# Altium PCB SerialIO.PCBDOC
Units mil, origin at the board's own origin, x right, y up, seen from the top; angles counter-clockwise.
Board outline 6250 x 3000 mil, 4 copper layers (Top Layer, Internal Plane 1, Internal Plane 2, Bottom Layer); 89 components, 92 nets, 484 pads, 631 vias.
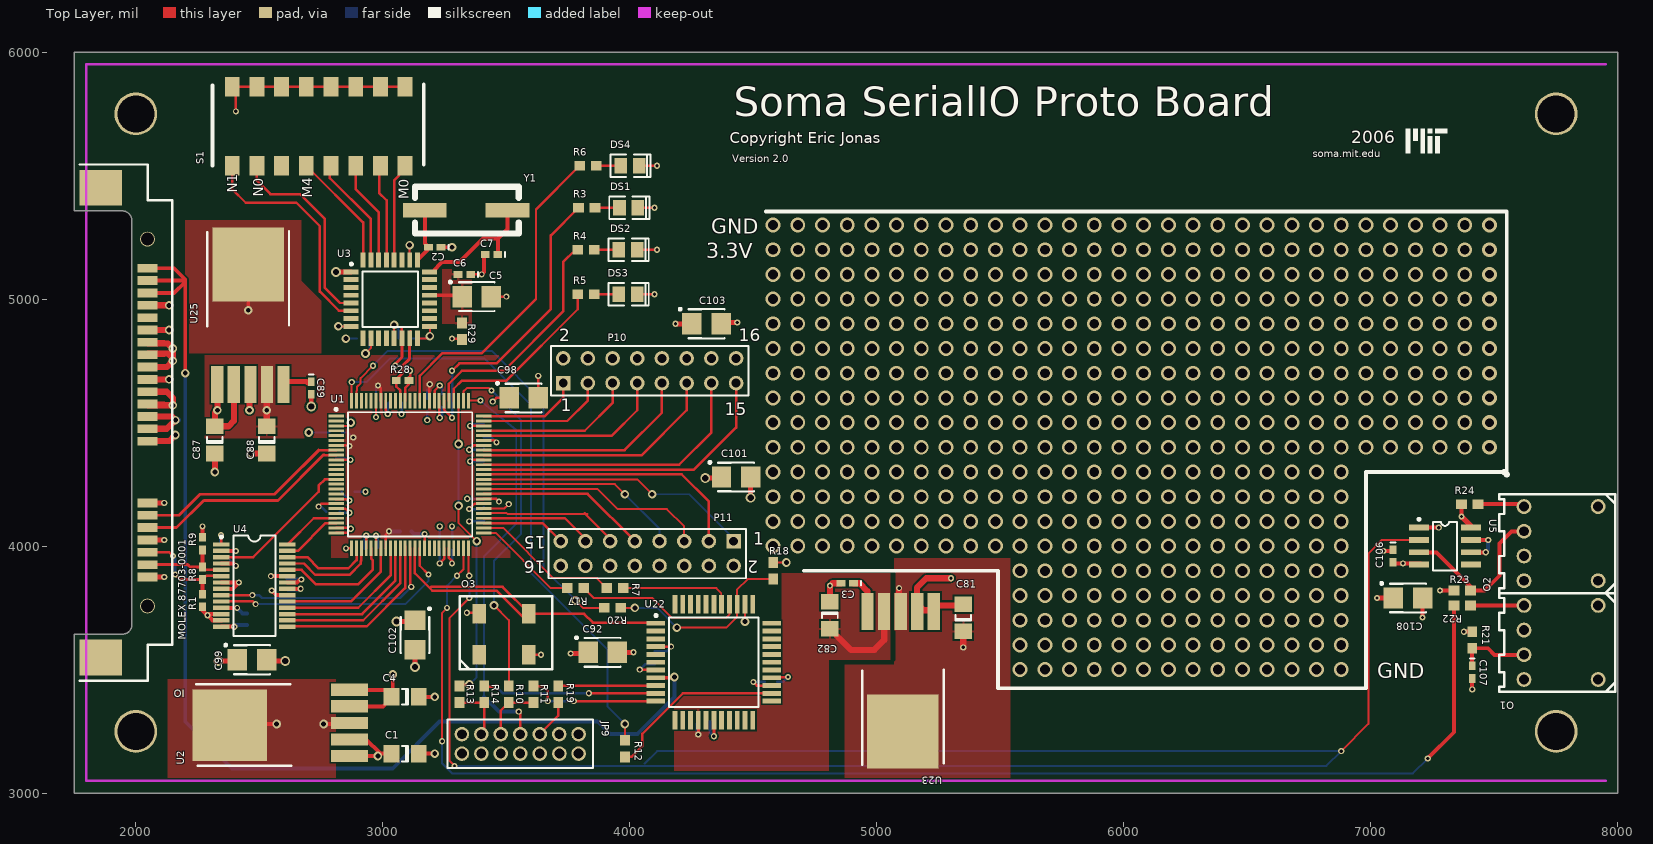
[diagram p0: Top Layer view]
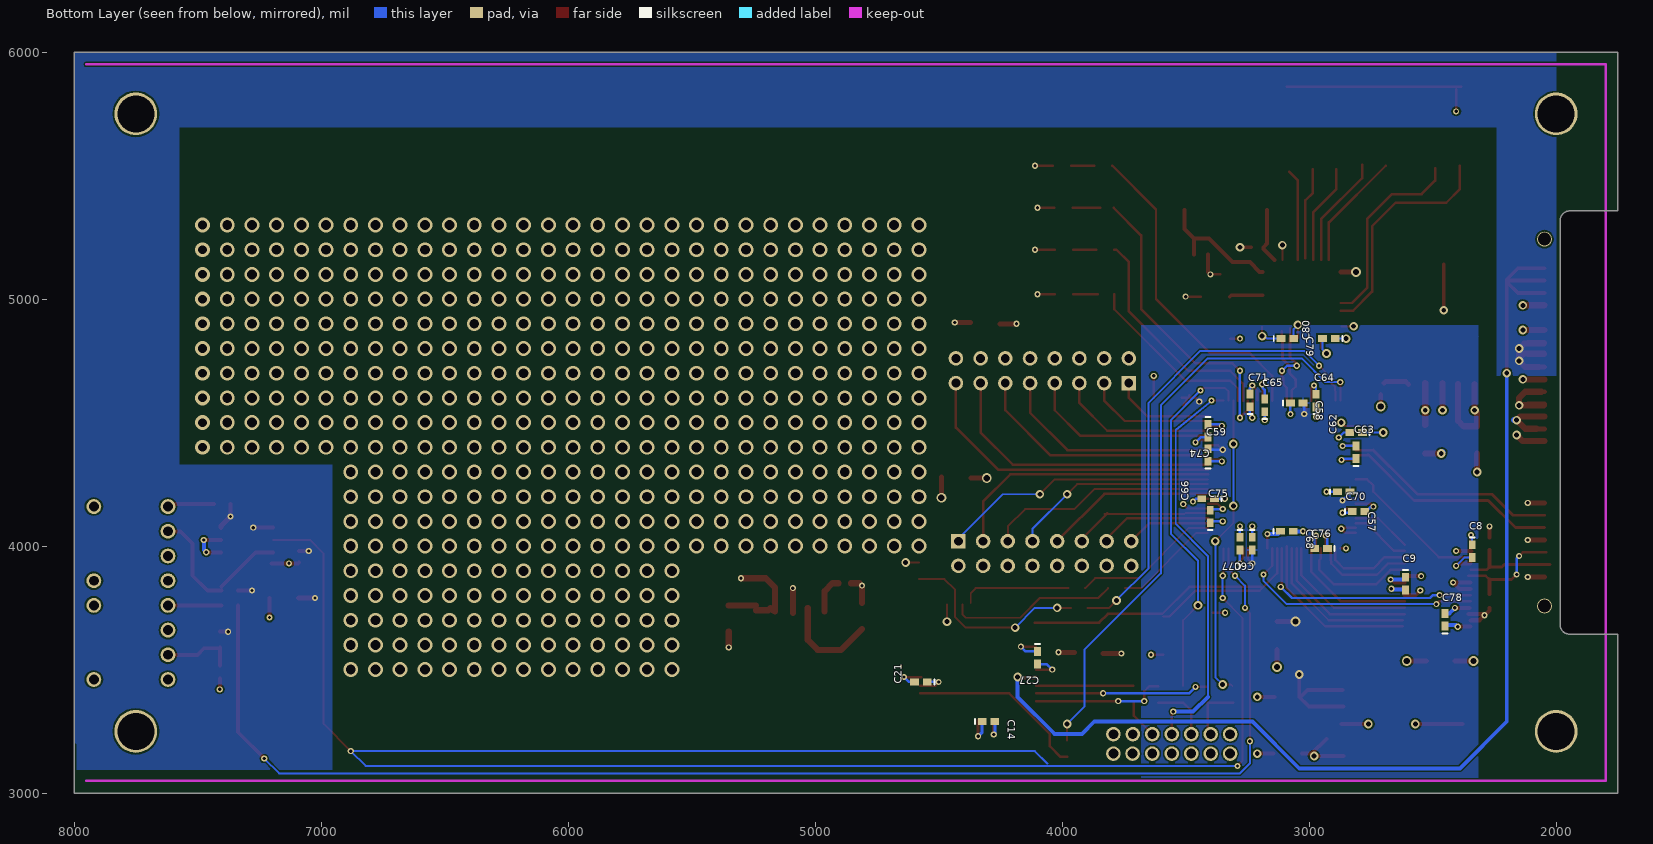
[diagram p1: Bottom Layer view, seen from below]
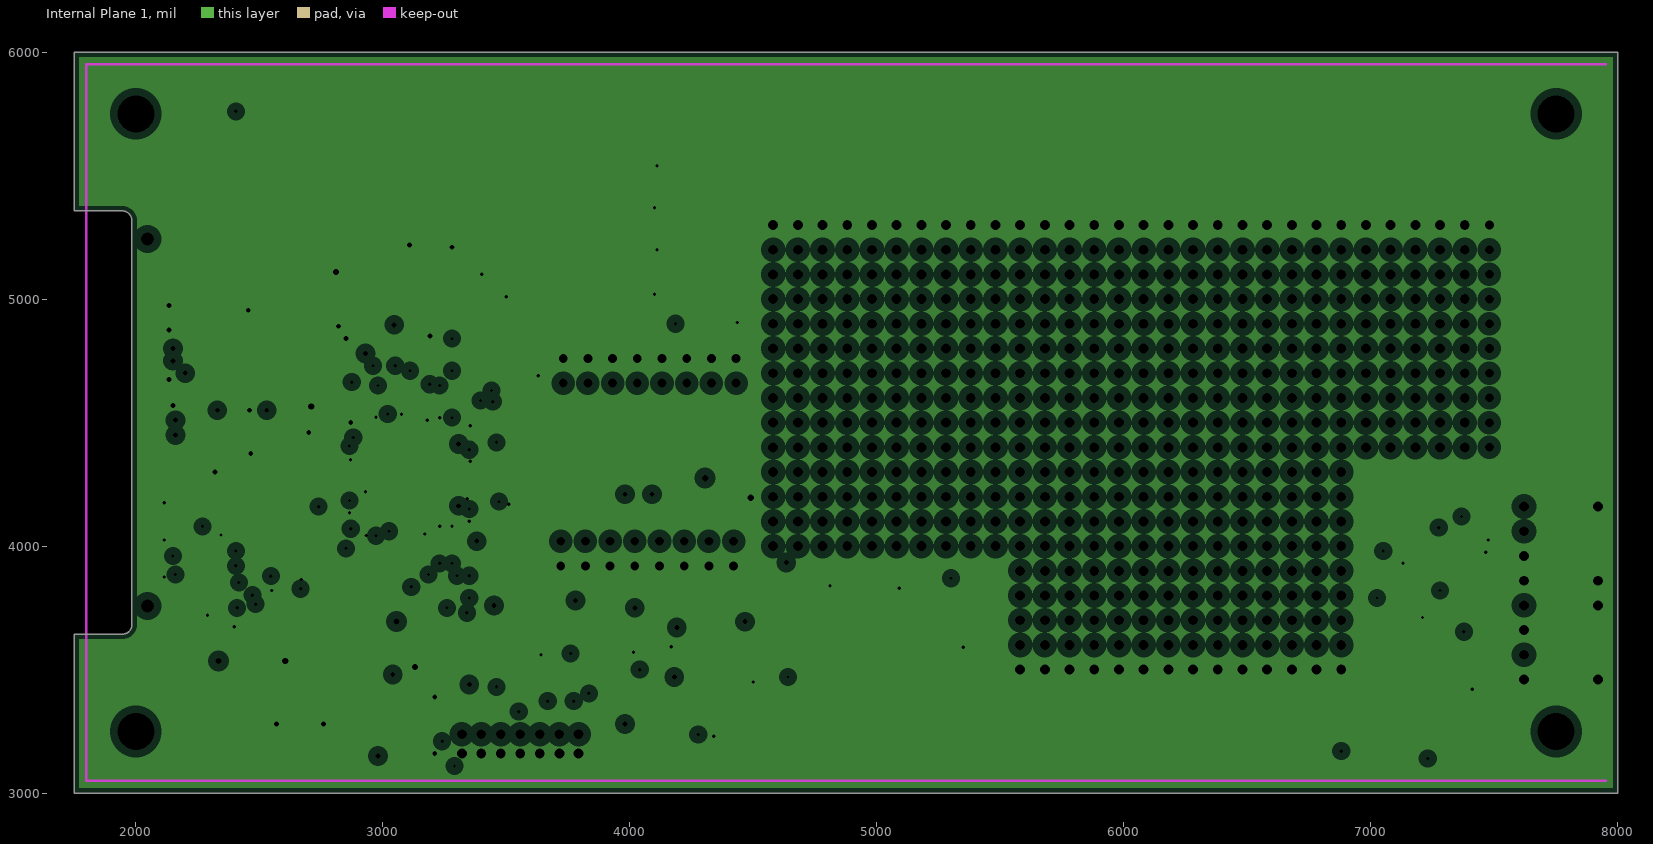
[diagram p2: Internal Plane 1, clearances drawn from the general rule]
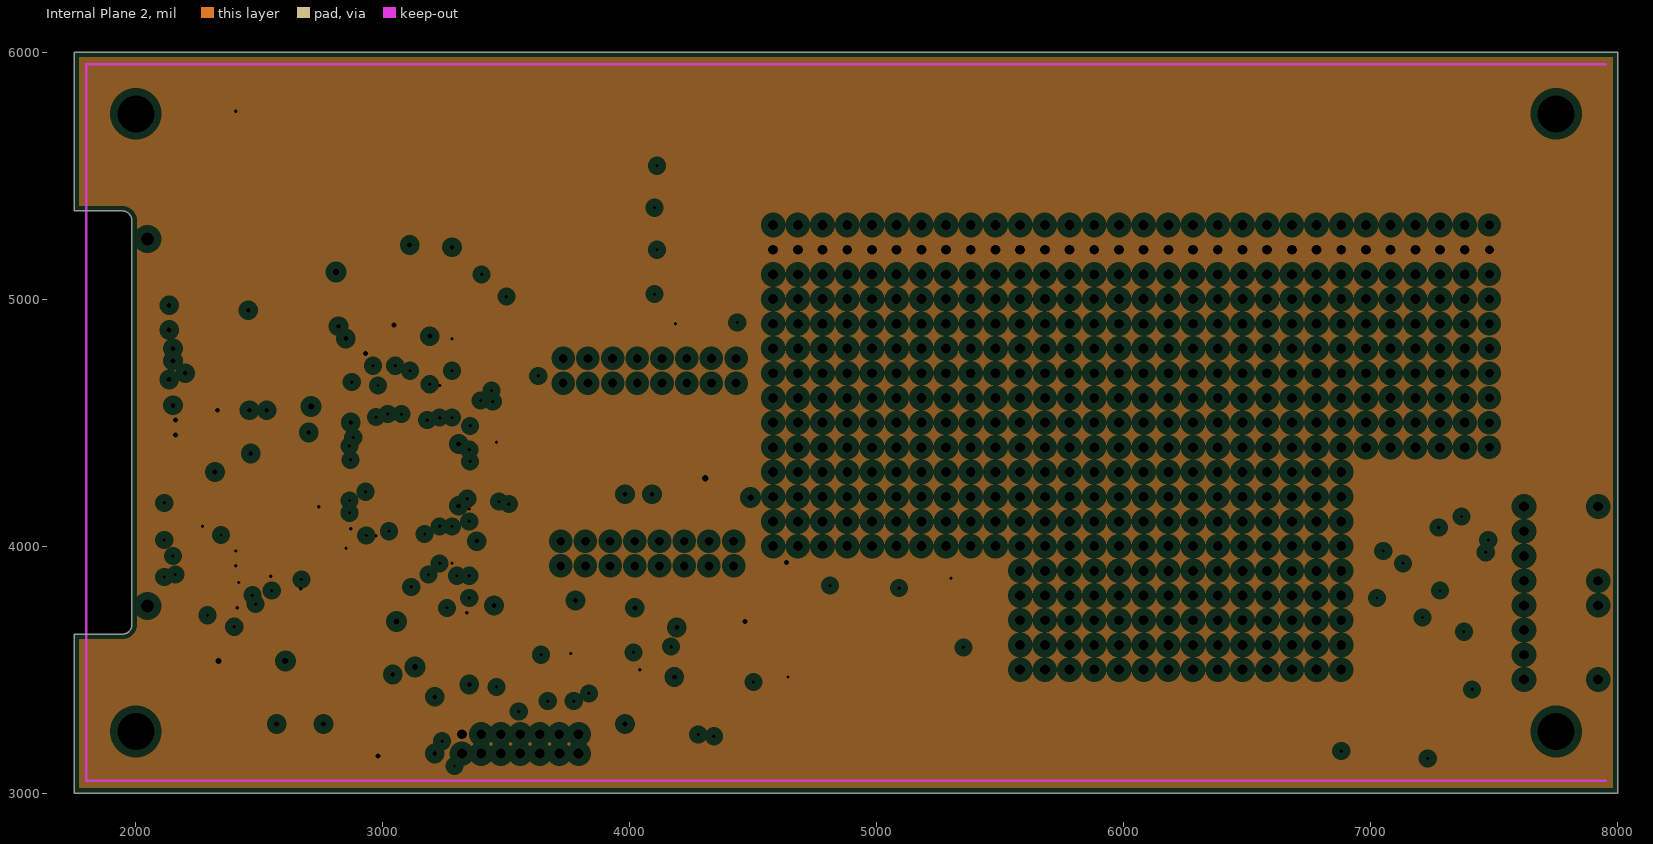
[diagram p3: Internal Plane 2, clearances drawn from the general rule]

## Layer stack, top to bottom
Top Layer: signal copper 1.4
Dielectric: core 12.6, FR-4, Dk 4.8
Internal Plane 1: plane copper 1.4, net GND
Dielectric: prepreg 12.6, FR-4, Dk 4.8
Internal Plane 2: plane copper 1.4, net VCC
Dielectric: core 12.6, FR-4, Dk 4.8
Bottom Layer: signal copper 1.4

## Board outline
1750,3000 1750,3643.11 1944.88,3643.11 ccw(c1944.88,3682.48) 1984.25,3682.48 1984.25,5317.52 ccw(c1944.88,5317.52) 1944.88,5356.89 1750,5356.89 1750,6000 8000,6000 8000,3000

## Design rules (kind name [scope] priority, off if disabled: settings)
Clearance [All] p1: gap=7
ComponentClearance [All] p1: gap=10 collisioncheckmode=0 verticalgap=10
HoleSize [All] p1: absolutevalues=TRUE maxlimit=200 minlimit=1 maxpercent=80.000 minpercent=20.000
PlaneClearance [All] p1: clearance=30
PlaneConnect [All] p1: planeconnectstyle=Relief reliefexpansion=20 reliefentries=4 reliefconductorwidth=15 reliefairgap=8
PolygonConnect "thermal relief" [(HasFootprint('KTT'))] p1: connectstyle=Direct reliefconductorwidth=10 reliefentries=4 polygonreliefangle="90 Angle"
PolygonConnect [All] p2: connectstyle=Relief reliefconductorwidth=10 reliefentries=4 polygonreliefangle="90 Angle"
RoomDefinition PowerClocks [InComponentClass('PowerClocks')] p1: confinementstyle=ConfineIn formatcopy=TRUE lockcomponents=FALSE outline 0,0 2000,0 2000,1000 0,1000
RoomDefinition FPGA [InComponentClass('FPGA')] p2: confinementstyle=ConfineIn formatcopy=TRUE lockcomponents=FALSE outline 0,0 2000,0 2000,1000 0,1000
RoomDefinition fiber [InComponentClass('fiber')] p3: confinementstyle=ConfineIn formatcopy=TRUE lockcomponents=FALSE outline 0,0 2000,0 2000,1000 0,1000
RoutingVias [All] p1: holewidth=13.5 width=25 viastyle="Through Hole" minholewidth=13.5 minwidth=25 maxholewidth=28 maxwidth=50
SolderMaskExpansion [All] p1: expansion=4
TestPointUsage [All] p1: valid=0 allowmultiple=FALSE
Testpoint [All] p1: side=15 testpointundercomponent=TRUE minsize=40 maxsize=100 preferedsize=60 minholesize=0 maxholesize=40 preferedholesize=32 testpointgrid=1 style=1023 order=0123456789
Width [All] p1: maxlimit=200 minlimit=7 preferedwidth=7 toplayer_prefwidth=12 bottomlayer_prefwidth=8 minimp=50.000000 maximp=50.000000 favimp=50.000000
14 further rules are at their usual default settings.

## Classes and differential pairs
component class PowerClocks: C1 C2 C3 C4 C5 C6 C7 C14 C21 C27 C28 C31 C57 C58 C59 C60 C62 C63 C64 C65 C66 C67 C68 C69 C70 C71 C74 C75 C76 C77 C78 C79 C80 C81 C82 C87 C88 C89 C92 C96 C98 C99 C100 C101 C102 C103 JP9 O3 R10 R11 R12 R13 R14 R19 R29 S1 U2 U3 U22 U23 U25 Y1
component class FPGA: C8 C9 C83 C84 DS1 DS2 DS3 DS4 IO J1 P1 P10 P11 P? R1 R2 R3 R4 R5 R6 R7 R8 R9 R15 R16 R17 R18 R20 R28 U1 U4
component class fiber: C106 C107 C108 O1 O2 R21 R22 R23 R24 U5
net class RXDATA[0..9]: RXDATA0 RXDATA1 RXDATA2 RXDATA3 RXDATA4 RXDATA5 RXDATA6 RXDATA7 RXDATA8 RXDATA9

## Components (designator, comment, footprint, x,y, rotation, side; value= is the part's Value field where it differs from the comment)
C1 "10uF" CC3216-1206 3090,3160 r180 top
C2 "Cap" CC1005-0402 3210,5210 r180 top
C3 "Cap" CC1005-0402 4880,3850 r180 top
C4 "10uF" CC3216-1206 3090,3390 r180 top
C5 "Bypass Cap" TC3528-1411 3380,5010 r0 top
C6 "Cap" CC1005-0402 3330,5100 r180 top
C7 "Cap" CC1005-0402 3440,5180 r180 top
C8 "Cap" CC1005-0402 2340,3980 r270 bottom
C9 "Cap" CC1005-0402 2610,3848.25 r270 bottom
C14 "Cap" CC1005-0402 4298.25,3290 r180 bottom
C21 "Cap" CC1005-0402 4571.75,3450 r0 bottom
C27 "Cap" CC1005-0402 4100,3548.25 r270 bottom
C57 "Cap" CC1005-0402 2860,4220 r180 bottom
C58 "Cap" CC1005-0402 3050,4580 r180 bottom
C59 "Cap" CC1005-0402 3409.21,4368.74 r90 bottom
C60 "Cap" CC1005-0402 3230,4010 r270 bottom
C62 "Cap" CC1005-0402 2810,4460 r0 bottom
C63 "Cap" CC1005-0402 2810,4380 r90 bottom
C64 "Cap" CC1005-0402 2972.2,4589.21 r90 bottom
C65 "Cap" CC1005-0402 3180,4570 r90 bottom
C66 "Cap" CC1005-0402 3409.21,4191.57 r0 bottom
C68 "Cap" CC1005-0402 3090,4060 r180 bottom
C70 "Cap" CC1005-0402 2800,4140 r180 bottom
C71 "Cap" CC1005-0402 3240,4590 r90 bottom
C74 "Cap" CC1005-0402 3409.21,4467.17 r270 bottom
C75 "Cap" CC1005-0402 3400,4120 r90 bottom
C76 "Cap" CC1005-0402 2951.75,3990 r0 bottom
C77 "Cap" CC1005-0402 3280,4010 r270 bottom
C78 "Cap" CC1005-0402 2450,3701.75 r90 bottom
C79 "Cap" CC1005-0402 3088.25,4840 r180 bottom
C80 "Cap" CC1005-0402 2920,4840 r0 bottom
C81 "10uF" CC3216-1206 5350,3710 r90 top
C82 "10uF" CC3216-1206 4810,3720 r270 top
C87 "10uF" CC3216-1206 2320,4430 r90 top
C88 "10uF" CC3216-1206 2530,4430 r90 top
C89 "Cap" CC1005-0402 2710,4640 r270 top
C92 "Bypass Cap" TC3528-1411 3890,3570 r0 top
C98 "Bypass Cap" TC3528-1411 3570,4600 r0 top
C99 "Bypass Cap" TC3528-1411 2470,3540 r0 top
C101 "Bypass Cap" TC3528-1411 4430,4280 r0 top
C102 "Bypass Cap" TC3528-1411 3130,3640 r270 top
C103 "Bypass Cap" TC3528-1411 4310,4900 r0 top
C106 "Cap" CC1005-0402 7090,3960 r270 top
C107 "Cap" CC1005-0402 7410,3490 r270 top
C108 "" TC3528-1411 7150,3790 r0 top
DS1 "LED3" "SMD _LED" 3995.19,5370 r180 top
DS2 "LED3" "SMD _LED" 3992.6,5200 r180 top
DS3 "LED3" "SMD _LED" 3992.6,5020 r180 top
DS4 "LED3" "SMD _LED" 4000,5540 r180 top
IO "SATA 23-pin header" "MOLEX 87703-0001" 2047.24,4500 r270 top locked
JP9 "Header 7X2" HDR2x7-2mm 3320,3160 r270 top
O1 "HFBR-2528" HPVL 7620,3610 r90 top
O2 "HFBR-1528" HPVL 7620,4010 r90 top
O3 "OSC2" ECS-3953M 3390,3560 r0 top
P10 "Header 8X2" HDR2X8 3730,4660 r0 top
P11 "Header 8X2" HDR2X8 4420,4020 r180 top
R1 "100" CR1005-0402 2270,3780 r90 top
R3 "Res1" CR1608-0603 3825.19,5370 r0 top
R4 "Res1" CR1608-0603 3822.6,5200 r0 top
R5 "Res1" CR1608-0603 3822.6,5020 r0 top
R6 "Res1" CR1608-0603 3830,5540 r0 top
R7 "Res1" CR1608-0603 3940,3830 r0 top
R8 "100" CR1005-0402 2270,3890 r90 top
R9 "100" CR1005-0402 2270,4010 r270 top
R10 "current-limiting series res" CR1608-0603 3510,3400 r90 top
R11 "current-limiting series res" CR1608-0603 3610,3400 r270 top
R12 "current-limiting series res" CR1608-0603 3980,3180 r90 top
R13 "current-limiting series res" CR1608-0603 3310,3400 r270 top
R14 "current-limiting series res" CR1608-0603 3410,3400 r270 top
R17 "Res1" CR1608-0603 3780,3830 r0 top
R18 "Limit R" CR1608-0603 4580,3900 r90 top
R19 "current-limiting series res" CR1608-0603 3710,3400 r270 top
R20 "Res1" CR1608-0603 3930,3750 r0 top
R21 "Res1" CR1608-0603 7410,3620 r270 top
R22 "Res1" CR1608-0603 7370,3760 r0 top
R23 "Res1" CR1608-0603 7370,3820 r180 top
R24 "Res1" CR1608-0603 7400,4170 r180 top
R28 "100" CR1005-0402 3080,4670 r0 top
R29 "Res1" CR1608-0603 3320,4870 r90 top
S1 "SW DIP-8" CANNON-SDA 3090,5700 r180 top
U1 "XC3S50-4VQ100C" "Xilinx TQ100" 3110,4290 r0 top locked
U2 "TPS78601 ADJ" KTT 2890,3150 r90 top
U3 "ICS8442" QFP7x7-G32/N 3030,5000 r0 top
U4 "DS92LV1224" SSO-G28/E4.3 2480,3840 r270 top
U5 "SN75451BD" SO-G8/E2.5 7300,4000 r270 top
U22 "Xilinx CoolRunner-II XC2C64A" QFP10x10-G44/G10N 4340,3530 r0 top
U23 "TPS78618 1.8 V" KTT 5230,3760 r180 top
U25 "TPS78625 2.5 V" KTT 2330,4630 r0 top
Y1 "25 MHz 18pF" "ECS CSM-7" 3170,5360 r0 top

## Footprints (in the part's own frame and the unit in brackets; to place one, negate y for a bottom-side part, rotate by r counter-clockwise, add the part's x,y. Pads: shape width x height; smd on the part's side, far side on the other; paste and mask are expansions set on the pad)
CANNON-SDA [mil] "Cannon SDA 12-pos SMT DIP"
  rect 60x80 smd: 1(0,-160) 2(100,-160) 3(200,-160) 4(300,-160) 5(400,-160) 6(500,-160) 7(600,-160) 8(700,-160) 9(700,160) 10(600,160) 11(500,160) 12(400,160) 13(300,160) 14(200,160) 15(100,160) 16(0,160)
  silkscreen extent -75,-170 780,160
CC1005-0402 [mm] "Chip Capacitor; Body 1.0 x 0.5 mm (LxW typ)"
  rect 0.9x0.7 smd: 1(-0.65,0) 2(0.65,0)
  silkscreen extent -1.4,-0.25 -1.4,0.25
CC3216-1206 [mm] "Chip Capacitor; Body 3.2 x 1.6 mm (LxW typ)"
  rect 1.6x1.8 smd: 1(-1.4,0) 2(1.4,0)
  silkscreen extent -0.3,-0.8 0.3,0.8
CR1005-0402 [mm] "Chip Resistor; Body 1.1 x 0.5 mm (LxW typ)"
  rect 0.9x0.7 smd: 1(-0.65,0) 2(0.65,0)
CR1608-0603 [mm] "Chip Resistor; Body 1.6 x 0.8 mm (LxW typ)"
  rect 1.1x1 smd: 1(-0.85,0) 2(0.85,0)
"ECS CSM-7" [mm] "ECS Quartz Crystal SMT"
  rect 4.5x1.5 smd: 1(0,0) 2(8.5,0)
  silkscreen extent -1.02,-2.41 9.65,2.41
ECS-3953M [mm] "ECS SMD CLOCK OSCILLATOR"
  rect 1.4x2 smd: 1(0,0) 2(5.08,0) 3(5.08,4.2) 4(0,4.2)
  silkscreen extent -2,-1.5 7.5,6
HDR2x7-2mm [mm]
  round 1.5 hole 1: 1(0,0) 2(-2,0) 3(0,2) 4(-2,2) 5(0,4) 6(-2,4) 7(0,6) 8(-2,6) 9(0,8) 10(-2,8) 11(0,10.033) 12(-2,10) 13(0,12) 14(-2,12)
  silkscreen extent -3.5,-1.5 1.5,13.5
HDR2X8 [mm] "Connector; Header; 8x2 Position"
  rect 1.5x1.5 hole 0.9: 1(0,0)
  round 1.5 hole 0.9: 2(0,2.54) 3(2.54,0) 4(2.54,2.54) 5(5.08,0) 6(5.08,2.54) 7(7.62,0) 8(7.62,2.54) 9(10.16,0) 10(10.16,2.54) 11(12.7,0) 12(12.7,2.54) 13(15.24,0) 14(15.24,2.54) 15(17.78,0) 16(17.78,2.54)
  silkscreen extent -1.27,-1.27 19.05,3.81
HPVL [mil]
  round 60 hole 40: 1(150,0) 2(50,0) 3(-50,0) 4(-150,0) 5(-150,-300) 8(150,-300)
  silkscreen extent -200,-370 200,100
KTT [mil] "TI DDPAK-5"
  rect 50x150 smd: 1(0,25) 2(67,25) 3(134,25) 4(201,25) 5(268,25)
  rect 290x300 smd: 3(125,510)
  silkscreen extent -40,260 290,645
"MOLEX 87703-0001" [mm] "Molex 1.27mm pitch SATA device plug, 2.5\" drive, without jumper, 22 circuits"
  rect 3.66x4.4 smd: 0(-24.15,-4.8) 0(24.15,-4.8)
  round 1.524 hole 1.346: 0(-18.865,0) 0(18.865,0)
  rect 0.9x2.1 smd: 1(15.875,0) 2(14.605,0) 3(13.335,0) 4(12.065,0) 5(10.795,0) 6(9.525,0) 7(8.255,0) P1(1.905,0) P2(0.635,0) P3(-0.635,0) P4(-1.905,0) P5(-3.175,0) P6(-4.445,0) P7(-5.715,0) P8(-6.985,0) P9(-8.255,0) P10(-9.525,0) P11(-10.795,0) P12(-12.065,0) P13(-13.335,0) P14(-14.605,0) P15(-15.875,0)
  silkscreen extent -26.54,-6.99 26.54,2.54
QFP7x7-G32/N [mm] "32-Pin Plastic Thin Quad Flat Pack (TFQP)"
  rect 1.55x0.5 smd: 1(-4.025,2.8) 2(-4.025,2) 3(-4.025,1.2) 4(-4.025,0.4) 5(-4.025,-0.4) 6(-4.025,-1.2) 7(-4.025,-2) 8(-4.025,-2.8) 17(4.025,-2.8) 18(4.025,-2) 19(4.025,-1.2) 20(4.025,-0.4) 21(4.025,0.4) 22(4.025,1.2) 23(4.025,2) 24(4.025,2.8)
  rect 0.5x1.55 smd: 9(-2.8,-4.025) 10(-2,-4.025) 11(-1.2,-4.025) 12(-0.4,-4.025) 13(0.4,-4.025) 14(1.2,-4.025) 15(2,-4.025) 16(2.8,-4.025) 25(2.8,4.025) 26(2,4.025) 27(1.2,4.025) 28(0.4,4.025) 29(-0.4,4.025) 30(-1.2,4.025) 31(-2,4.025) 32(-2.8,4.025)
  silkscreen extent -4.12,-2.85 2.85,3.72
QFP10x10-G44/G10N [mm] "QFP, Metric; 44 Leads; Body 10 x 10 mm; Pitch 0.8 mm"
  rect 1.9x0.5 smd: 1(-5.95,4) 2(-5.95,3.2) 3(-5.95,2.4) 4(-5.95,1.6) 5(-5.95,0.8) 6(-5.95,0) 7(-5.95,-0.8) 8(-5.95,-1.6) 9(-5.95,-2.4) 10(-5.95,-3.2) 11(-5.95,-4) 23(5.95,-4) 24(5.95,-3.2) 25(5.95,-2.4) 26(5.95,-1.6) 27(5.95,-0.8) 28(5.95,0) 29(5.95,0.8) 30(5.95,1.6) 31(5.95,2.4) 32(5.95,3.2) 33(5.95,4)
  rect 0.5x1.9 smd: 12(-4,-5.95) 13(-3.2,-5.95) 14(-2.4,-5.95) 15(-1.6,-5.95) 16(-0.8,-5.95) 17(0,-5.95) 18(0.8,-5.95) 19(1.6,-5.95) 20(2.4,-5.95) 21(3.2,-5.95) 22(4,-5.95) 34(4,5.95) 35(3.2,5.95) 36(2.4,5.95) 37(1.6,5.95) 38(0.8,5.95) 39(0,5.95) 40(-0.8,5.95) 41(-1.6,5.95) 42(-2.4,5.95) 43(-3.2,5.95) 44(-4,5.95)
  silkscreen extent -6.07,-4.6 4.6,4.92
"SMD _LED" [mm] "SMT LED; 2 Leads"
  rect 1.3x1.6 smd: 1(0.95,0) 2(-0.95,0)
  silkscreen extent -2.13,-1.15 2,1.15
SO-G8/E2.5 [mm] "Small Outline, Plastic; 8 Leads; Body Width 3.9 mm"
  rect 0.6x2.05 smd: 1(-1.905,-2.675) 2(-0.635,-2.675) 3(0.635,-2.675) 4(1.905,-2.675) 5(1.905,2.675) 6(0.635,2.675) 7(-0.635,2.675) 8(-1.905,2.675)
  silkscreen extent -2.88,-2.8 2.5,1.25
SSO-G28/E4.3 [mm] "SSOP; 28 Leads; Body Width 5.3 mm; Pitch 0.65 mm"
  rect 0.45x1.7 smd: 1(-4.225,-3.4) 2(-3.575,-3.4) 3(-2.925,-3.4) 4(-2.275,-3.4) 5(-1.625,-3.4) 6(-0.975,-3.4) 7(-0.325,-3.4) 8(0.325,-3.4) 9(0.975,-3.4) 10(1.625,-3.4) 11(2.275,-3.4) 12(2.925,-3.4) 13(3.575,-3.4) 14(4.225,-3.4) 15(4.225,3.4) 16(3.575,3.4) 17(2.925,3.4) 18(2.275,3.4) 19(1.625,3.4) 20(0.975,3.4) 21(0.325,3.4) 22(-0.325,3.4) 23(-0.975,3.4) 24(-1.625,3.4) 25(-2.275,3.4) 26(-2.925,3.4) 27(-3.575,3.4) 28(-4.225,3.4)
  silkscreen extent -5.18,-3.52 5.18,2.15
TC3528-1411 [mm] "Capacitor, SM Tantalum; Body 3.5 x 2.8 mm (LxW typ)"
  rect 2x2.2 smd: 1(-1.5,0) 2(1.5,0)
  silkscreen extent -2.82,-1.5 1.85,1.62
"Xilinx TQ100" [mm] "QFP; 100 Leads; Body 14 x 14 mm; Pitch 0.5 mm"
  rect 1.6x0.3 smd: 1(-7.6,6) 2(-7.6,5.5) 3(-7.6,5) 4(-7.6,4.5) 5(-7.6,4) 6(-7.6,3.5) 7(-7.6,3) 8(-7.6,2.5) 9(-7.6,2) 10(-7.6,1.5) 11(-7.6,1) 12(-7.6,0.5) 13(-7.6,0) 14(-7.6,-0.5) 15(-7.6,-1) 16(-7.6,-1.5) 17(-7.6,-2) 18(-7.6,-2.5) 19(-7.6,-3) 20(-7.6,-3.5) 21(-7.6,-4) 22(-7.6,-4.5) 23(-7.6,-5) 24(-7.6,-5.5) 25(-7.6,-6) 51(7.6,-6) 52(7.6,-5.5) 53(7.6,-5) 54(7.6,-4.5) 55(7.6,-4) 56(7.6,-3.5) 57(7.6,-3) 58(7.6,-2.5) 59(7.6,-2) 60(7.6,-1.5) 61(7.6,-1) 62(7.6,-0.5) 63(7.6,0) 64(7.6,0.5) 65(7.6,1) 66(7.6,1.5) 67(7.6,2) 68(7.6,2.5) 69(7.6,3) 70(7.6,3.5) 71(7.6,4) 72(7.6,4.5) 73(7.6,5) 74(7.6,5.5) 75(7.6,6)
  rect 0.3x1.6 smd: 26(-6,-7.6) 27(-5.5,-7.6) 28(-5,-7.6) 29(-4.5,-7.6) 30(-4,-7.6) 31(-3.5,-7.6) 32(-3,-7.6) 33(-2.5,-7.6) 34(-2,-7.6) 35(-1.5,-7.6) 36(-1,-7.6) 37(-0.5,-7.6) 38(0,-7.6) 39(0.5,-7.6) 40(1,-7.6) 41(1.5,-7.6) 42(2,-7.6) 43(2.5,-7.6) 44(3,-7.6) 45(3.5,-7.6) 46(4,-7.6) 47(4.5,-7.6) 48(5,-7.6) 49(5.5,-7.6) 50(6,-7.6) 76(6,7.6) 77(5.5,7.6) 78(5,7.6) 79(4.5,7.6) 80(4,7.6) 81(3.5,7.6) 82(3,7.6) 83(2.5,7.6) 84(2,7.6) 85(1.5,7.6) 86(1,7.6) 87(0.5,7.6) 88(0,7.6) 89(-0.5,7.6) 90(-1,7.6) 91(-1.5,7.6) 92(-2,7.6) 93(-2.5,7.6) 94(-3,7.6) 95(-3.5,7.6) 96(-4,7.6) 97(-4.5,7.6) 98(-5,7.6) 99(-5.5,7.6) 100(-6,7.6)
  silkscreen extent -7.72,-6.4 6.4,6.82

## Part data
C1 C4 C81 C82 C87 C88: library part Cap, "Capacitor"
C2 C3 C6 C7 C8 C9 C14 C21 C27 C57 C58 C59 C60 C62 C63 C64 C65 C66 C68 C70 C71 C74 C75 C76 C77 C78 C79 C80 C89 C106 C107: "Capacitor"
C5 C92 C98 C99 C101 C102 C103: library part "Cap Pol3", "Tantalum Bypass cap"
C108: library part Cap2, "Capacitor"
DS1 DS2 DS3 DS4: "Typical BLUE SiC LED"
IO: library part SATA-23
JP9: "Header, 7-Pin, Dual row"
O1: "Low-cost fiber receiver"
O2: "Low-cost fiber transmitter"
O3: "ECS SMD Oscillator, ECS-3953M"
P10 P11: "Header, 8-Pin, Dual row"
R1 R8 R9 R10 R11 R12 R13 R14 R18 R19 R28: library part Res1, "Resistor"
R3 R4 R5 R6 R7 R17 R20 R21 R22 R23 R24 R29: "Resistor"
S1: "DIP Switch, 8 Position, SPST"
U1: "Xilinx Spartan-3 VQ100"
U2 U23 U25: library part TPS786XX, "TI 1.5A LDO"
U3: "700 MHx Crystal Oscillator-todifferential LVDS Freq Synth"
U4: "30-66 MHz 10-Bit Bus LVDS Deserializer"
U5: "Dual Peripheral Driver"
U22: library part XC2C64A-5VQ44C
Y1: library part XTAL, "Crystal Oscillator"

## Free pads (board coordinates)
  round 173.23 hole 149.61: 4(2000,3250) 4(2000,5750) 4(7750,3250) 4(7750,5750)

## Via types
v1: diameter 60, hole 40, Top Layer to Bottom Layer, 456 vias
v2: diameter 25, hole 13.5, Top Layer to Bottom Layer, 113 vias
v3: diameter 35, hole 20, Top Layer to Bottom Layer, 44 vias
v4: diameter 60, hole 35, Top Layer to Bottom Layer, 10 vias
v5: diameter 40, hole 25, Top Layer to Bottom Layer, 8 vias

## Nets (pads, with @x,y where several pads share a name; then routed paths per layer and width w, separated by ;. In a path a pad name is that pad's centre, name@x,y a point inside that pad or via, vN(x,y) a via of type N, cw(c..) or ccw(c..) an arc to the next point about the centre after c; other vN are vias at no path point)
+1.2VCC: C4.2 C57.2 C58.2 C59.2 C60.2 C98.1 C102.1 U1.18 U1.45 U1.69 U1.93 U2.4 U2.5 | length 1112.6
  Top Layer w10: U1.18@2810,4190 v2@2860,4190 ; U1.93 3011.57,4548.43 v2@3020,4540 ; v2(3230,3930) 3247.8,3947.8 U1.45 ; v2(3350,4390) 3368.11,4408.11 U1.69 ; v2(3445,4585) 3460,4600 C98.1@3515,4600 ; C98.1@3485,4610 C98.1@3510,4570
  Top Layer w16: U2.4@2860,3350 3000,3350 C4.2@3040,3390 ; U2.5 3006.19,3418 3034.19,3390 C4.2@3040,3390 ; v3(3040,3480) C4.2@3040,3390
  Top Layer w20: v5(3055,3695) C102.1@3130,3695
  Bottom Layer w10: C57.2 2834.41,4215.59 v2@2860,4190 ; v2@3020,4540 3020,4575.59 C58.2 ; v2(3230,3930) C60.2@3230,3990 ; v2(3350,4390) 3404.88,4390 C59.2
  other v2: 2865,4185 3020,4535
+1.8VCC: C14.2 C82.2 U22.15 U23.4 | length 507.9
  Top Layer w12: v2(4277.01,3237.01) U22.15
  Top Layer w25: C82.2 4894.88,3580 4990,3580 5030,3620 U23.4@5030,3750
  Bottom Layer w12: C14.2@4272.66,3282.66 4272.66,3241.35 v2(4277.01,3237.01)
+2.5VCC: C62.2 C63.2 C64.2 C65.2 C66.2 C68.2 C88.2 U1.6 U1.7 U1.33 U1.58 U1.84 U1.94 U25.4 | length 729.2
  Top Layer w10: U1.7@2830,4408.11 2861.89,4408.11 v2(2864.41,4405.59) ; v2(2980,4650) 2991.89,4638.11 U1.94 ; U1.33 3011.57,4046.57 v2(3025,4060) ; U1.84 3188.74,4641.26 ; U1.58 3458.43,4191.57 3460,4190
  Top Layer w25: C88.2@2530,4490 U25.4@2530,4660
  Bottom Layer w10: C63.2 v2(2864.41,4405.59) ; C62.2 2860,4460 v2(2880,4440) ; C64.2 2972.2,4642.2 v2(2980,4650) ; C65.2 3180,4632.52 3188.74,4641.26 ; C66.2 3458.43,4191.57 v2(3470,4180)
  Bottom Layer w16: v2(3025,4060) C68.2@3070,4060
  other v2: 3190,4655
  other v3: 2530,4550
+5VCC: C106.1 C108.1 IO.P7 IO.P8 IO.P9 R21.1 R23.2 R24.2 U5.1 U5.8 | length 943.7
  Top Layer w16: v2(7050,3980) C106.1@7090,3980 ; U5.1 v2(7275,4075) ; v2(7280,3820) R23.2 ; v2@7366.54,4113.78 R24.2 ; v2(7376.54,3653.46) R21.1
  Top Layer w20: IO.P7 2115,4725 ; IO.P8 2115,4775 ; IO.P9 2115,4825 ; v2(7025,3790) C108.1 ; v2(7366.54,4120) 7405.31,4081.22 U5.8
  Top Layer w25: IO.P8@2050,4780 2130,4780 2150,4760 v3(2150,4800) 2130,4820 IO.P9@2050,4820 ; IO.P7@2070,4725 2125,4725 v3(2150,4750)
DSP0RX+: IO.6 U1.8 | length 872.7
  Top Layer w10: 2740,4388.43 U1.8
  Top Layer w12: IO.6 2175,4125 2260,4210 2561.57,4210 2607.01,4255.44 2740,4388.43
DSP0RX-: IO.5 U1.9 | length 885.2
  Top Layer w10: 2763.74,4368.74 U1.9
  Top Layer w12: IO.5 2165,4075 2275,4185 2575,4185 2758.74,4368.74 2763.74,4368.74
DSP0TX+: IO.2 R8.2 R9.2 U4.5 | length 398.7
  Top Layer w10: R8.2 2281.61,3903.98 U4.5
  Top Layer w12: IO.2@2025,3925 2210,3925 2219.41,3915.59 R8.2
  Top Layer w16: R8.2 R9.2
DSP0TX-: IO.3 R1.2 R8.1 U4.6 | length 464.2
  Top Layer w10: IO.3@2040,3975 2135,3975 v2(2150,3960) ; R8.1 2285.59,3880 U4.6@2355,3880
  Top Layer w12: v2(2160,3885) 2180.59,3864.41 R8.1
  Top Layer w16: R1.2 R8.1
  Bottom Layer w10: v2(2150,3960) 2160,3950 v2(2160,3885)
GND: C1.1 C2.1 C3.2 C4.1 C5.2 C6.1 C7.2 C8.1 C9.1 C14.1 C21.1 C27.1 C57.1 C58.1 C59.1 C60.1 C62.1 C63.1 C64.1 C65.1 C66.1 C68.1 C70.1 C71.1 C74.1 C75.1 C76.1 C77.1 C78.1 C79.1 C80.1 C81.1 C82.1 C87.1 C88.1 C89.2 C92.2 C98.2 C99.2 C101.2 C102.2 C103.2 C106.2 C107.2 C108.2 DS1.2 DS2.2 DS3.2 DS4.2 IO.1 IO.4 IO.7 IO.P4 IO.P5 IO.P6 IO.P10 IO.P12 JP9.1 JP9.3 JP9.5 JP9.7 JP9.9 JP9.11 JP9.13 O1.2 O1.4 O1.5 O1.8 O2.3 O2.4 O2.5 O2.8 O3.2 P10.2 P10.4 P10.6 P10.8 P10.10 P10.12 P10.14 P10.16 P11.2 P11.4 P11.6 P11.8 P11.10 P11.12 P11.14 P11.16 R1.1 U1.3 U1.10 U1.20 U1.29 U1.41 U1.56 U1.66 U1.73 U1.82 U1.95 U2.3 U3.1 U3.8 U3.16 U3.17 U3.26 U4.1 U4.12 U4.13 U4.14 U4.20 U4.22 U5.4 U5.6 U5.7 U22.4 U22.17 U22.25 U23.3 U25.3 | length 6491.1
  Top Layer w8: U1.3 2856.85,4486.85 v3(2870,4500) ; v3(2820,4890) U3.8@2870,4890 ; U3.26 v3(3108.74,5218.74) ; U3.16@3140,4840 v3@3180,4840 ; v3(3190,4850) U3.17@3190,4890 ; U1.56 3492.2,4152.2 v2(3510,4170)
  Top Layer w10: v2(2345,4045) U4.1 ; U1.20 2847.8,4152.2 v2(2865,4135) ; U1.10 v2(2869.06,4349.06) ; U1.29 v2(2932.83,4042.83) ; v2(2972.2,4522.2) U1.95 ; U1.41 v2(3169.06,4049.06) ; v2@3228.11,4521.89 U1.82 ; v2@3340,4190 v2(3341.57,4191.57) ; v2(3353.15,4343.15) 3359.06,4349.06 U1.66 ; v2(3353.15,4486.85) U1.73 ; C6.1@3360,5100 v2(3400,5100) ; C5.2 v2(3500,5010) ; O3.2 v2(3640,3560) ; C98.2 v2(3629.06,4689.06) ; DS3.2 v2(4100,5020) ; DS2.2 v2(4110,5200) ; DS1.2 v2(4100,5370) ; DS4.2 v2(4110,5540) ; U22.4 v2(4167.01,3592.99) ; v2(4500,3450) 4514.49,3435.51 U22.25
  Top Layer w12: v2(4340,3230) U22.17
  Top Layer w16: R1.1@2270,3750 2270,3740 2310,3700 U4.13@2340,3700 ; v2(2290,3720) 2295,3725 U4.12@2355,3725 ; 2310.75,3699.25 U4.13 ; U4.14 v2(2398.66,3673.66) ; U2.3@2380,3280 v3(2570,3280) ; v3(2455,4955) U25.3@2455,5140 ; v2(2550,3820) 2568.39,3801.61 U4.20@2615,3801.61 ; U4.22 2652.8,3852.8 v2@2665,3865 ; v3(2760,3280) U2.3@2870,3280 ; C4.1@3140,3390 v3(3210,3390) ; C1.1 v3(3210,3160) ; C2.1 v3(3280,5210) ; v2(3400,5100) 3410,5110 C7.2@3410,5180 ; C106.2 7094.41,3930 U5.4@7200,3930 ; v2(7209.06,3710.94) C108.2 ; U5.6 v2(7465,3975) ; U5.7 v2(7475,4025) ; v2(7410,3420) C107.2
  Top Layer w20: IO.1 v2(2115,3875) ; IO.4 v2(2115,4025) ; IO.7 v2(2115,4175) ; IO.P4 2115,4575 ; IO.P5 2115,4625 ; IO.P6 2115,4675 ; IO.P10 2115,4875 ; IO.P12 2115,4975 ; C99.2@2525,3535 v5(2605,3535) ; v5(2710,4565) C89.2 ; v5@2820.24,5110.24 U3.1 ; v5(3130,3510) C102.2 ; C92.2 v2(4015,3570) ; C103.2@4370,4905 v2(4435,4905) ; v5(4489.06,4195.94) C101.2
  Top Layer w25: IO.P6 v3(2135,4675) ; IO.P10 v3(2135,4875) ; IO.P12 v3(2135,4975) ; IO.P4@2050,4570 v3(2150,4570) 2150,4600 2125,4625 IO.P5@2060,4625 ; v3(2320,4300) C87.1 ; v3(2460,4550) U25.3@2460,4660 ; v3(2465.12,4374.88) C88.1 ; C82.1@4810,3770 v2(4810,3840) ; 4820,3850 C3.2 ; U23.3@5090,3730 v2(5090,3830) ; v2(5350,3590) C81.1
  Bottom Layer w8: C8.1 2340,4040 v2(2345,4045) ; v3(2700,4460) C62.1 ; v3(2850,4840) C80.1 ; C79.1 3170,4840 v3@3190,4860
  Bottom Layer w10: C63.1 2863.7,4354.41 v2(2869.06,4349.06) ; C70.1 2830.59,4135 v2(2865,4135) ; C57.1 v2(2930,4220) ; C76.1 2926.16,4031.16 v2@2932.83,4037.83 ; v2(2972.2,4522.2) C64.1 ; v2(3075.59,4534.41) C58.1 ; v2(3180,4510) C65.1 ; C60.1 v2(3230,4080) ; v2(3230,4520) 3240,4530 C71.1 ; C77.1 v2(3280,4080) ; v2(3341.57,4191.57) C66.1 ; v2(3350,4100) C75.1@3410,4100 ; v2(3353.15,4343.15) C59.1 ; v2(3353.15,4486.85) 3359.05,4492.76 C74.1 ; C27.1 4147.86,3573.84 v2(4167.01,3592.99) ; v2(4500,3450) C21.1
  Bottom Layer w12: C14.1 4323.84,3246.16 v2(4340,3230)
  Bottom Layer w16: v2(2398.66,3673.66) 2405,3680 C78.1@2450,3680 ; C9.1 2618.84,3865 v2@2665,3865 ; C68.1 3126.54,4049.06 v2(3169.06,4049.06) ; v2(7465,3975) 7475,3985 v2(7475,4025)
  Bottom Layer w20: v5(4489.06,4195.94) v5@4495,4190
  Bottom Layer w25: v3@2460,4380 v3(2465.12,4374.88)
  other v1: 5580,3500 5680,3500 5780,3500 5880,3500 5980,3500 6080,3500 6180,3500 6280,3500 6380,3500 6480,3500 6580,3500 6680,3500 6780,3500 6880,3500 4580,5300 4680,5300 4780,5300 4880,5300 4980,5300 5080,5300 5180,5300 5280,5300 5380,5300 5480,5300 5580,5300 5680,5300 5780,5300 5880,5300 5980,5300 6080,5300 6180,5300 6280,5300 6380,5300 6480,5300 6580,5300 6680,5300 6780,5300 6880,5300 6980,5300 7080,5300 7180,5300 7280,5300 7380,5300
  other v2: 2670,3865 7130,3930
  other v4: 7480,5300
  other v5: 2810,5110
NetC2_2: C2.2 U3.25 Y1.1 | length 225.8
  Top Layer w16: U3.25 3184.41,5202.64 C2.2 3170,5224.41 Y1.1
NetC3_1: C3.1 U23.5 | length 152.7
  Top Layer w25: C3.1 4930,3850 4962,3818 U23.5
NetC5_1: C5.1 C6.2 R29.2 U3.21 | length 134.9
  Top Layer w15: U3.21 3315.2,5015.75 C5.1
NetC7_1: C7.1 U3.24 Y1.2 | length 529.4
  Top Layer w16: U3.24 3200.24,5110.24 3240,5150 3310,5150 3405.59,5245.59 3465.59,5245.59 ; C7.1 3465.59,5245.59 ; Y1.2 3504.65,5284.65 3465.59,5245.59
NetC89_1: C89.1 U25.5 | length 104.9
  Top Layer w20: U25.5 2608.59,4665.59 2690.59,4665.59 2696.18,4660
NetC107_1: C107.1 O1.3 R21.2 | length 295.4
  Top Layer w16: C107.1 R21.2@7410,3590 ; R21.2 7473.46,3586.54 7500,3560 O1.3
NetDS1_1: DS1.1 R3.2 | length 112.6
  Top Layer w10: R3.2@3845.19,5370 DS1.1
NetDS2_1: DS2.1 R4.2 | length 92.6
  Top Layer w10: R4.2@3862.6,5200 DS2.1
NetDS3_1: DS3.1 R5.2 | length 99.1
  Top Layer w10: R5.2 DS3.1
NetDS4_1: DS4.1 R6.2 | length 92.6
  Top Layer w10: R6.2@3870,5540 DS4.1
NetIO_P13: IO.P13 IO.P14 IO.P15 U22.8 | length 4656.3
  Top Layer w16: IO.P13 2155,5025 2200,5070 ; IO.P14 2195,5075 ; IO.P15 2155,5125 2200,5080 v3(2200,4700) ; U22.8 4177.01,3467.01 v3(4180,3470)
  Bottom Layer w16: v3(2200,4700) 2200,3290 2390,3100 3040,3100 3230,3290 3870,3290 3920,3240 4030,3240 4180,3390 v3(4180,3470)
NetO1_1: O1.1 R22.2 | length 216.5
  Top Layer w16: R22.2 O1.1
NetO2_1: O2.1 R24.1 | length 194.8
  Top Layer w16: R24.1 7600,4170 O2.1@7620,4150
NetO2_2: O2.2 R23.1 U5.3 | length 658.2
  Top Layer w16: U5.3 7265,3975 R23.1@7403.46,3836.54 ; R23.1 7460,3820 7520,3880 7520,4010 7570,4060 O2.2
NetO3_3: O3.3 U1.39 U22.1 | length 1608.5
  Top Layer w10: U1.39 3129.68,3890.32 3200,3820 3460,3820 3565,3715 O3.3@3590,3715 ; 3195,3835 3485,3835 3594.65,3725.35 3814.65,3725.35 3850,3690 U22.1@4110,3690
NetP10_1: P10.1 U1.75 | length 411.3
  Top Layer w10: U1.75 3656.22,4526.22 3730,4600 P10.1
NetP10_3: P10.3 U1.74 | length 525.4
  Top Layer w10: U1.74 3746.54,4506.54 3830,4590 P10.3
NetP10_5: P10.5 U1.72 | length 647.5
  Top Layer w10: U1.72 3817.17,4467.17 3930,4580 P10.5
NetP10_7: P10.7 U1.71 | length 773.3
  Top Layer w10: U1.71 3927.48,4447.48 4030,4550 P10.7
NetP10_9: P10.9 U1.68 | length 903.6
  Top Layer w10: U1.68 3978.43,4388.43 4130,4540 P10.9
NetP10_11: P10.11 U1.67 | length 1005.9
  Top Layer w10: U1.67 4048.74,4368.74 4230,4550 P10.11
NetP10_13: P10.13 U1.65 | length 1174.9
  Top Layer w10: U1.65 4199.37,4329.37 4330,4460 P10.13
NetP10_15: P10.15 U1.64 | length 1271.3
  Top Layer w10: U1.64 4259.69,4309.69 4430,4480 P10.15
NetP11_1: P11.1 U1.62 | length 1124.5
  Top Layer w8: U1.62 4029.68,4270.32 v3(4090,4210)
  Bottom Layer w8: v3(4090,4210) 4240,4210 P11.1@4430,4020
NetP11_3: P11.3 U1.63 | length 1116.4
  Top Layer w10: U1.63 4210,4290 4320,4180 P11.3
NetP11_5: P11.5 U1.60 | length 933.3
  Top Layer w8: U1.60 3870,4230.94 3950.95,4150 4150,4150 4220,4080 P11.5
NetP11_7: P11.7 U1.61 | length 835.6
  Top Layer w8: U1.61 3939.37,4250.63 v3(3980,4210)
  Bottom Layer w8: v3(3980,4210) 4120,4070 P11.7
NetP11_9: P11.9 U1.59 | length 690
  Top Layer w10: U1.59 3828.74,4211.26 P11.9
NetP11_11: P11.11 U1.55 | length 585.3
  Top Layer w8: U1.55@3400,4135 3500,4135 3505,4130
  Top Layer w10: 3505,4130 3828.27,4130 ; 3817.48,4132.52 3920,4030 P11.11
NetP11_13: P11.13 U1.54 | length 445.1
  Top Layer w10: U1.54 3737.17,4112.83 P11.13@3820,4030
NetP11_15: P11.15 U1.53 | length 341.1
  Top Layer w10: U1.53 3646.85,4093.15 P11.15
NetR2_1: U1.2
NetR3_1: R3.1 U1.81 | length 1232.4
  Top Layer w10: U1.81 3247.8,4552.2 v2(3280,4520) ; v2(3280,4710) 3310,4740 3460,4740 3680,4960 3680,5258.27 R3.1
  Bottom Layer w10: v2(3280,4520) v2(3280,4710)
NetR4_1: R4.1 U1.80 | length 931.8
  Top Layer w10: U1.80 3267.48,4657.48 3320,4710 3490,4710 3730,4950 3730,5150 3780,5200 R4.1
NetR5_1: R5.1 U1.79 | length 744.2
  Top Layer w10: U1.79 3287.17,4637.17 3320,4670 3500,4670 3789.13,4959.13 R5.1
NetR6_1: R6.1 U1.86 | length 1312.6
  Top Layer w10: U1.86 3149.37,4689.37 3240,4780 3400,4780 3620,5000 3620,5363.46 R6.1
NetR7_1: R7.1 U1.52 | length 598.2
  Top Layer w8: U1.52 3486.54,4073.46 3690,3870 3866.54,3870 R7.1
NetR7_2: R7.2 U22.38 | length 444.8
  Top Layer w8: R7.2 4350,3830 4370,3810 U22.38@4370,3770
NetR10_2: R10.2 U1.77 | length 1477.2
  Top Layer w8: U1.77 3326.54,4626.54 3340,4640 3430,4640 v2(3440,4630) ; v3(3450,3760) 3510,3700 R10.2
  Bottom Layer w8: v2(3440,4630) 3560,4510 3560,4050 3450,3940 v3(3450,3760)
NetR11_1: R11.1 U22.11 | length 544.4
  Top Layer w10: R11.1 3646.54,3433.46 3667.48,3412.52 v2(3667.48,3372.52) ; v2(3772.52,3372.52) U22.11
  Bottom Layer w10: v2(3667.48,3372.52) v2(3772.52,3372.52)
NetR12_1: R12.1 U22.24 | length 730.2
  Top Layer w10: R12.1 4006.54,3146.54 4050,3190 4050,3240 4214.02,3404.01 U22.24
NetR12_2: R12.2 U1.100 | length 2433.3
  Top Layer w8: U1.100 v2(2873.78,4663.78) ; R12.2 v3(3980,3280)
  Bottom Layer w8: v2(2873.78,4663.78) 2933.78,4663.78 3030,4760 3410,4760 3600,4570 3600,3890 3910,3580 3910,3350 v3(3980,3280)
NetR13_1: R13.1 U1.78 | length 1234.6
  Top Layer w8: v3(3306.85,4163.15) 3306.85,4093.15 v3(3380,4020) ; v3(3306.85,4413.15) U1.78 ; R13.1 3316.54,3440 v3(3350,3440)
  Bottom Layer w8: v3(3306.85,4163.15) v3(3306.85,4413.15) ; v3(3350,3440) 3380,3470 v3(3380,4020)
NetR14_1: R14.1 U22.10 | length 707.9
  Top Layer w10: R14.1 3413.46,3430 v2(3460,3430) ; v2(3834.01,3404.01) U22.10
  Bottom Layer w10: v2(3460,3430) 3485.99,3404.01 v2(3834.01,3404.01)
NetR16_2: U1.1
NetR17_1: R17.1 U1.51 | length 430
  Top Layer w8: U1.51 3456.22,4053.78 3680,3830 R17.1
NetR17_2: R17.2 U22.37 | length 685.9
  Top Layer w8: R17.2 3853.46,3790 4090,3790 4170,3710 4390,3710 4402.99,3722.99 U22.37
NetR18_1: R18.1 R20.2 U22.36 | length 795.5
  Top Layer w8: R20.2 v3(4020,3750) ; v3(4190,3670) 4390,3670 4434.49,3714.49 4434.49,3824.49 4476.54,3866.54 R18.1
  Bottom Layer w8: v3(4020,3750) 4110,3750 v3(4190,3670)
NetR19_1: R19.1 U22.9 | length 393.7
  Top Layer w10: R19.1@3712.05,3435.51 U22.9
NetR20_1: R20.1 U1.99 | length 1953
  Top Layer w8: U1.99 2893.46,4628.92 2896.25,4631.71 2896.25,4646.25 2910,4660 2910,4680 v2(2960,4730) ; v3(3780,3780) 3810,3750 R20.1
  Bottom Layer w8: v2(2960,4730) 3020,4790 3440,4790 3650,4580 3650,3910 v3(3780,3780)
NetR22_1: R22.1 U1.49 | length 5602.2
  Top Layer w8: v2(3240,3210) 3240,3730 v2(3260,3750) ; v2(3300,3880) 3326.54,3906.54 U1.49
  Top Layer w16: v2(7230,3140) 7336.54,3246.54 R22.1
  Bottom Layer w8: v2(3240,3210) 3240,3120 3280,3080 7170,3080 v2(7230,3140) ; v2(3260,3750) 3260,3840 v2(3300,3880)
NetR28_1: R28.1 U1.90 U3.15 | length 310
  Top Layer w10: R28.1 3054.41,4645.59 3070.63,4629.37 U1.90 ; U3.15@3110,4841.54 U3.15@3110,4870
  Top Layer w12: R28.1 3054.41,4674.41 3080,4700 3080,4730 3108.74,4758.74 U3.15
NetR28_2: R28.2 U1.89 U3.14 | length 372.6
  Top Layer w10: U3.14 3077.24,4881.54 ; U1.89 3090.32,4640.31 3105.59,4655.59 3105.59,4684.41 ; R28.2@3110,4670 v2(3110,4710)
  Top Layer w12: v2(3050,4730) 3050,4737.76 3077.24,4765 U3.14
  Bottom Layer w9: v2(3050,4730) 3090,4730 v2(3110,4710)
NetS1_9: S1.9 U3.6 | length 935.7
  Top Layer w10: S1.9 2390,5445 2445,5390 2650,5390 2745,5295 2745,5030 2822.24,4952.76 U3.6
NetS1_10: S1.10 U3.5 | length 800.9
  Top Layer w10: S1.10@2490,5530 2490,5480 2545,5425 2665,5425 2765,5325 2765,5045 2825.75,4984.25 U3.5
NetS1_12: S1.12 U3.32 | length 476.7
  Top Layer w10: S1.12 2919.76,5310.24 U3.32
NetS1_13: S1.13 U3.31 | length 455.4
  Top Layer w10: S1.13@2785,5545 2785,5490 2951.26,5323.74 U3.31
NetS1_14: S1.14 U3.30 | length 405
  Top Layer w10: S1.14@2890,5525 2890,5445 2982.76,5352.24 U3.30
NetS1_15: S1.15 U3.29 | length 372.4
  Top Layer w10: S1.15@2985,5525 2985,5430 3015,5400 U3.29@3015,5165
NetS1_16: S1.16 U3.28 | length 370.7
  Top Layer w10: U3.28 3045.75,5480.75 S1.16@3080,5515
NetU1_14: U1.14 U4.3 | length 610
  Top Layer w10: U4.3 2475.16,3955.16 2740,4220 2740,4245.32 2765,4270.32 U1.14
NetU1_40: U1.40 U4.10 | length 1028.3
  Top Layer w10: U4.10 2473.98,3776.02 v2(2485,3765) ; U1.40 3149.37,3920.63 v2(3185,3885)
  Bottom Layer w8: v2(2485,3765) 3090,3765 3185,3860 v2(3185,3885)
NetU1_50: U1.50 U5.2 | length 8452.4
  Top Layer w8: v2(3290,3110) 3270,3130 3270,3710 v2(3350,3790) ; U1.50 3346.22,3883.78 v2(3350,3880) ; v2(6880,3170) 6990,3280 6990,3970 7045,4025 U5.2
  Bottom Layer w8: v2(3290,3110) 6820,3110 v2(6880,3170) 4110,3170 4060,3120 ; v2(3350,3790) v2(3350,3880)
NetU3_11: U3.11
NetU3_12: U3.12
NetU22_39: U22.39
NetU22_40: U22.40
RXCLK: U1.38 U4.9 | length 950.2
  Top Layer w10: U4.9 v2(2471.61,3801.61) ; U1.38 3110,3840 v2(3115,3835)
  Bottom Layer w10: v2(2471.61,3801.61) 2498.39,3801.61 2510,3790 3070,3790 v2(3115,3835)
RXDAT0: U1.22 U4.28 | length 241
  Top Layer w10: U4.28 2720.35,4112.83 U1.22
RXDAT1: U1.23 U4.27 | length 243.5
  Top Layer w10: U4.27 2655.75,3980.75 2768.15,4093.15 U1.23
RXDAT2: U1.27 U4.26 | length 359.5
  Top Layer w10: U4.26 2694.84,3955.16 2740,3910 2860,3910 2893.46,3943.46 U1.27
RXDAT3: U1.28 U4.25 | length 397
  Top Layer w10: U4.25 2680.43,3929.57 2726.2,3883.8 2865,3883.8 2910.46,3929.26 2910.46,3938.4 2913.15,3941.08 U1.28
RXDAT4: U1.30 U4.24 | length 484.3
  Top Layer w10: U4.24 2671.02,3903.98 2730,3845 2900,3845 2960,3905 2960,3942.52 2952.52,3950 U1.30
RXDAT5: U1.32 U4.19 | length 522
  Top Layer w10: U4.19 2871.02,3776.02 2991.89,3896.89 U1.32
RXDAT6: U1.34 U4.18 | length 581.1
  Top Layer w10: U4.18 2900.43,3750.43 3031.26,3881.26 U1.34
RXDAT7: U1.35 U4.17 | length 623.9
  Top Layer w10: U4.17 2915.79,3724.84 3050.94,3860 U1.35
RXDAT8: U1.36 U4.16 | length 653.5
  Top Layer w10: U4.16@2620,3700 2920.63,3700 3070.63,3850 U1.36
RXDAT9: U1.37 U4.15 | length 704.2
  Top Layer w10: U4.15@2620,3675 2935,3675 3090,3830 U1.37@3090,4000
TCK: JP9.6 R10.1 R11.2 | length 227.5
  Top Layer w10: JP9.6@3477.48,3252.52 3477.48,3334.02 R10.1 R11.2
TDI: JP9.10 R19.2 | length 158.9
  Top Layer w10: JP9.10 3710,3313.78 R19.2
TDO: JP9.8 U1.76 | length 1629
  Top Layer w8: U1.76 v2(3395,4589.21)
  Top Layer w10: v2(3550,3330) 3556.22,3323.78 JP9.8
  Bottom Layer w8: v2(3395,4589.21) 3540,4470 3540,4090 3410,3960 3410,3390
  Bottom Layer w16: 3410,3390 3470,3330 v2(3550,3330)
TMS: JP9.4 R13.2 R14.2 | length 235.9
  Top Layer w10: R13.2@3306.54,3366.54 R14.2 3410,3250 JP9.4
VCC: C1.2 C8.2 C9.2 C21.2 C27.2 C70.2 C71.2 C74.2 C75.2 C76.2 C77.2 C78.2 C79.2 C80.2 C81.2 C87.2 C92.1 C99.1 C101.1 C103.1 IO.P1 IO.P2 IO.P3 JP9.2 O3.4 R9.1 R18.2 R29.1 S1.1 S1.2 S1.3 S1.4 S1.5 S1.6 S1.7 S1.8 U1.19 U1.24 U1.25 U1.26 U1.31 U1.46 U1.57 U1.70 U1.83 U2.1 U2.2 U3.10 U3.13 U4.2 U4.4 U4.7 U4.8 U4.11 U4.21 U4.23 U22.7 U22.26 U22.35 U23.1 U23.2 U25.1 U25.2 | length 4951.8
  Top Layer w8: v3(2930,4780) 2951.26,4801.26 U3.10 ; U3.13 v3(3045.75,4895.75) ; v3(4465.98,3694.02) U22.35 ; R18.2 v3(4633.46,3933.46)
  Top Layer w10: U4.2@2340,3980 U4.2@2346.14,3980 ; S1.8@2385,5860 S1.1 ; v2(2405,5760) S1.8@2405,5850 ; 2407.2,3842.8 v2@2407.2,3852.8 ; v2(2740,4160) 2751.89,4171.89 U1.19 ; U1.25 2853.78,4053.78 v2(2870,4070) ; U1.24 v2@2866.54,4073.46 ; v2(2850.79,3990.79) U1.26 ; U1.31 v2(2972.2,4042.2) ; U1.83@3210,4590 3210,4630 v2(3230,4650) ; U1.46 3267.48,3952.52 v2@3280,3940 ; v2(3280,4840) R29.1@3320,4840 ; v2(3340,3730) O3.4@3390,3730 ; v2(3350,4150) 3371.89,4171.89 U1.57 ; U1.70 3452.2,4427.8 v2(3460,4420) ; v2(4040,3500) 4104.25,3500 U22.7 ; U22.26@4570,3470 v2(4640,3470)
  Top Layer w16: R9.1 v2(2270,4080) ; U4.2@2345,3980 v2(2405,3980) ; U4.8 2391.61,3827.2 v2(2417.2,3852.8) ; U4.7 v2@2407.2,3852.8 ; U4.4 2395.43,3929.57 v2(2405,3920) ; U4.11@2350,3750 v2(2410,3750) ; v2(2546.61,3878.39) U4.23 ; U4.21 v2(2667.2,3827.2) ; U2.1@2860,3150 v3(2980,3150) ; U2.2@2930,3220 2990,3160 C1.2@3030,3160
  Top Layer w20: IO.P1 2115,4425 ; IO.P2 2115,4475 ; IO.P3 2115,4525 ; v5(2335,3535) C99.1@2410,3535 ; v2(3760,3565) C92.1@3835,3565 ; v2(4185,4900) C103.1 ; v5(4305,4275) C101.1@4370,4275
  Top Layer w25: IO.P1 2135,4425 v3(2160,4450) ; IO.P3 2145,4525 v3(2160,4510) 2125,4475 IO.P2@2080,4475 ; U25.1 v3(2330,4550) 2320,4540 C87.2 2375.12,4485.12 2397,4507 U25.2 ; U23.2 5163,3833 5200,3870 v2(5300,3870) ; U23.2@5170,3740 5180,3750 5190,3740 U23.1@5240,3740 ; U23.1@5240,3760 C81.2@5350,3760
  Bottom Layer w8: C8.2 2370.59,3954.41 v2(2405,3920) ; v3(2930,4780) 2945.59,4795.59 C80.2 ; v3@3050,4900 v3(3045.75,4895.75) 3062.66,4878.83 C79.2
  Bottom Layer w10: v2(2740,4160) 2750,4160 C70.2@2770,4140 ; v2@2850,3990 v2(2850.79,3990.79) ; v2(2972.2,4042.2) 2980,4034.41 C76.2@2980,3992.66 ; v2(3230,4650) 3240,4640 C71.2 ; v2@3280,3940 C77.2 ; v2(3350,4150) 3401.1,4150 C75.2@3409.21,4158.11 ; C74.2 3438.43,4441.57 v2(3460,4420) ; v2(4040,3500) 4062.66,3522.66 C27.2 ; C21.2 4620,3450 v2(4640,3470)
  Bottom Layer w16: v2(2410,3750) 2432.66,3727.34 C78.2 ; C9.2@2615,3825 2665,3825 v2(2667.2,3827.2)
  Bottom Layer w25: v3(2160,4510) v3@2170,4510
  other v1: 4580,5200 4680,5200 4780,5200 4880,5200 4980,5200 5080,5200 5180,5200 5280,5200 5380,5200 5480,5200 5580,5200 5680,5200 5780,5200 5880,5200 5980,5200 6080,5200 6180,5200 6280,5200 6380,5200 6480,5200 6580,5200 6680,5200 6780,5200 6880,5200 6980,5200 7080,5200 7180,5200 7280,5200 7380,5200
  other v2: 3280,3930
  other v4: 7480,5200
pads on no net: IO.0 IO.P11 JP9.12 JP9.14 O3.1 S1.11 U1.4 U1.5 U1.11 U1.12 U1.13 U1.15 U1.16 U1.17 U1.21 U1.42 U1.43 U1.44 U1.47 U1.48 U1.85 U1.87 U1.88 U1.91 U1.92 U1.96 U1.97 U1.98 U3.2 U3.3 U3.4 U3.7 U3.9 U3.18 U3.19 U3.20 U3.22 U3.23 U3.27 U5.5 U22.2 U22.3 U22.5 U22.6 U22.12 U22.13 U22.14 U22.16 U22.18 U22.19 U22.20 U22.21 U22.22 U22.23 U22.27 U22.28 U22.29 U22.30 U22.31 U22.32 U22.33 U22.34 U22.41 U22.42 U22.43 U22.44
copper on no net:
  other v1: 5580,3600 5680,3600 5780,3600 5880,3600 5980,3600 6080,3600 6180,3600 6280,3600 6380,3600 6480,3600 6580,3600 6680,3600 6780,3600 6880,3600 5580,3700 5680,3700 5780,3700 5880,3700 5980,3700 6080,3700 6180,3700 6280,3700 6380,3700 6480,3700 6580,3700 6680,3700 6780,3700 6880,3700 5580,3800 5680,3800 5780,3800 5880,3800 5980,3800 6080,3800 6180,3800 6280,3800 6380,3800 6480,3800 6580,3800 6680,3800 6780,3800 6880,3800 5580,3900 5680,3900 5780,3900 5880,3900 5980,3900 6080,3900 6180,3900 6280,3900 6380,3900 6480,3900 6580,3900 6680,3900 6780,3900 6880,3900 4580,4000 4680,4000 4780,4000 4880,4000 4980,4000 5080,4000 5180,4000 5280,4000 5380,4000 5480,4000 5580,4000 5680,4000 5780,4000 5880,4000 5980,4000 6080,4000 6180,4000 6280,4000 6380,4000 6480,4000 6580,4000 6680,4000 6780,4000 6880,4000 4580,4100 4680,4100 4780,4100 4880,4100 4980,4100 5080,4100 5180,4100 5280,4100 5380,4100 5480,4100 5580,4100 5680,4100 5780,4100 5880,4100 5980,4100 6080,4100 6180,4100 6280,4100 6380,4100 6480,4100 6580,4100 6680,4100 6780,4100 6880,4100 4580,4200 4680,4200 4780,4200 4880,4200 4980,4200 5080,4200 5180,4200 5280,4200 5380,4200 5480,4200 5580,4200 5680,4200 5780,4200 5880,4200 5980,4200 6080,4200 6180,4200 6280,4200 6380,4200 6480,4200 6580,4200 6680,4200 6780,4200 6880,4200 4580,4300 4680,4300 4780,4300 4880,4300 4980,4300 5080,4300 5180,4300 5280,4300 5380,4300 5480,4300 5580,4300 5680,4300 5780,4300 5880,4300 5980,4300 6080,4300 6180,4300 6280,4300 6380,4300 6480,4300 6580,4300 6680,4300 6780,4300 6880,4300 4580,4400 4680,4400 4780,4400 4880,4400 4980,4400 5080,4400 5180,4400 5280,4400 5380,4400 5480,4400 5580,4400 5680,4400 5780,4400 5880,4400 5980,4400 6080,4400 6180,4400 6280,4400 6380,4400 6480,4400 6580,4400 6680,4400 6780,4400 6880,4400 6980,4400 7080,4400 7180,4400 7280,4400 7380,4400 4580,4500 4680,4500 4780,4500 4880,4500 4980,4500 5080,4500 5180,4500 5280,4500 5380,4500 5480,4500 5580,4500 5680,4500 5780,4500 5880,4500 5980,4500 6080,4500 6180,4500 6280,4500 6380,4500 6480,4500 6580,4500 6680,4500 6780,4500 6880,4500 6980,4500 7080,4500 7180,4500 7280,4500 7380,4500 4580,4600 4680,4600 4780,4600 4880,4600 4980,4600 5080,4600 5180,4600 5280,4600 5380,4600 5480,4600 5580,4600 5680,4600 5780,4600 5880,4600 5980,4600 6080,4600 6180,4600 6280,4600 6380,4600 6480,4600 6580,4600 6680,4600 6780,4600 6880,4600 6980,4600 7080,4600 7180,4600 7280,4600 7380,4600 4580,4700 4680,4700 4780,4700 4880,4700 4980,4700 5080,4700 5180,4700 5280,4700 5380,4700 5480,4700 5580,4700 5680,4700 5780,4700 5880,4700 5980,4700 6080,4700 6180,4700 6280,4700 6380,4700 6480,4700 6580,4700 6680,4700 6780,4700 6880,4700 6980,4700 7080,4700 7180,4700 7280,4700 7380,4700 4580,4800 4680,4800 4780,4800 4880,4800 4980,4800 5080,4800 5180,4800 5280,4800 5380,4800 5480,4800 5580,4800 5680,4800 5780,4800 5880,4800 5980,4800 6080,4800 6180,4800 6280,4800 6380,4800 6480,4800 6580,4800 6680,4800 6780,4800 6880,4800 6980,4800 7080,4800 7180,4800 7280,4800 7380,4800 4580,4900 4680,4900 4780,4900 4880,4900 4980,4900 5080,4900 5180,4900 5280,4900 5380,4900 5480,4900 5580,4900 5680,4900 5780,4900 5880,4900 5980,4900 6080,4900 6180,4900 6280,4900 6380,4900 6480,4900 6580,4900 6680,4900 6780,4900 6880,4900 6980,4900 7080,4900 7180,4900 7280,4900 7380,4900 4580,5000 4680,5000 4780,5000 4880,5000 4980,5000 5080,5000 5180,5000 5280,5000 5380,5000 5480,5000 5580,5000 5680,5000 5780,5000 5880,5000 5980,5000 6080,5000 6180,5000 6280,5000 6380,5000 6480,5000 6580,5000 6680,5000 6780,5000 6880,5000 6980,5000 7080,5000 7180,5000 7280,5000 7380,5000 4580,5100 4680,5100 4780,5100 4880,5100 4980,5100 5080,5100 5180,5100 5280,5100 5380,5100 5480,5100 5580,5100 5680,5100 5780,5100 5880,5100 5980,5100 6080,5100 6180,5100 6280,5100 6380,5100 6480,5100 6580,5100 6680,5100 6780,5100 6880,5100 6980,5100 7080,5100 7180,5100 7280,5100 7380,5100
  other v4: 7480,4400 7480,4500 7480,4600 7480,4700 7480,4800 7480,4900 7480,5000 7480,5100

## Polygon pours and split planes (outlines as drawn)
NetC5_1 on Top Layer (solid): 3360,5120 3360,4900 3370,4900 3240,4900 3240,5120
+1.8VCC on Top Layer (solid): 4180,3090 4805.76,3090 4805.76,3540 5055,3540 5055,3890 4614.85,3890 4614.85,3404.01 4180,3404.01
GND on Top Layer (solid): 5540,3850 5540,3060 4870,3060 4870,3520 5070,3520 5070,3950 5540,3950
GND on Top Layer (solid): 2308.04,4780 2750,4780 2750,5320 2200,5320 2200,4780
GND on Top Layer (solid): 2810,3050 2810,3460 2130,3460 2130,3050
+2.5VCC on Top Layer (solid): 3515,4773.61 3515,3953.61 2791.7,3953.61 2791.7,4438.61 2664.99,4437.35 2279.59,4437.35 2279.59,4772.44 3515,4772.44
+1.2VCC on Bottom Layer (solid): 2314.43,4869.73 2314.43,3050 3680,3050 3680,4895 2314.43,4895 2314.43,4849.51 2310,4844.45 2314.43,4844.45
+5VCC on Bottom Layer (solid): 7995,3195 7995,6000 2000,6000 2000,4690 2240,4690 2240,5695 7575,5695 7575,4330 6955,4330 6955,3095 7990,3095 7990,3200
GND on Internal Plane 1 (split plane): 1770.02,3020.01 1770.02,3623.09 1944.88,3623.09 ccw(c1944.88,3682.48) 2004.27,3682.48 2004.27,5317.52 ccw(c1944.88,5317.52) 1944.88,5376.9 1770.02,5376.9 1770.02,5979.98 7979.98,5979.98 7979.98,3020.01
VCC on Internal Plane 2 (split plane): 1770.02,3020.01 1770.02,3623.09 1944.88,3623.09 ccw(c1944.88,3682.48) 2004.27,3682.48 2004.27,5317.52 ccw(c1944.88,5317.52) 1944.88,5376.9 1770.02,5376.9 1770.02,5979.98 7979.98,5979.98 7979.98,3020.01

## Keep-outs
Keep-Out Layer:
  lines w10: 7950,3050 1800,3050 1800,5950 7950,5950

## Silkscreen, mask and mechanical layers (free items; w line width, h text height)
Top Overlay:
  rectangle: 7260,5590 7280,5660
  rectangle: 7230,5670 7250,5690
  rectangle: 7230,5590 7250,5660
  rectangle: 7260,5670 7310,5690
  rectangle: 7200,5590 7220,5690
  rectangle: 7170,5640 7190,5690
  rectangle: 7140,5590 7160,5690
  lines w15: 4550,5355 7550,5355 7550,4290 ; 4705,3900 5490,3900 5490,3425 6980,3425 6980,4300 7540,4300
  lines w25: 7540,4300 7550,4290
  text "Soma SerialIO Proto Board" at 4420,5740 h120
  text "Copyright Eric Jonas" at 4405,5630 h45
  text "2006" at 6920,5630 h50
  text "soma.mit.edu" at 6765,5575 h30
  text "Version 2.0" at 4415,5555 h30
  text "N1" at 2410,5430 h40 r90
  text "N0" at 2515,5415 h40 r90
  text "M4" at 2715,5410 h40 r90
  text "M0" at 3105,5405 h40 r90
  text "GND" at 4330,5265 h60
  text "3.3V" at 4310,5165 h60
  text "GND" at 7025,3465 h60
Mechanical 5:
  lines w1: 8000,3000 1750,3000 1750,3643.11 1944.88,3643.11 ccw(c1944.88,3682.48) 1984.25,3682.48 1984.25,5317.52 ccw(c1944.88,5317.52) 1944.88,5356.89 1750,5356.89 1750,6000 8000,6000
Mechanical 6:
  lines w1: 8000,3000 2000,3000 2000,6000 8000,6000

## Dimensions
1800,3050 to 1800,5950 on Mechanical 1
1800,3050 to 7950,3050 on Mechanical 1

## Text inside footprints (layer, text, board x,y; h text height)
IO: Top Overlay "MOLEX 87703-0001" at 2202.24,3620 h30 r90
P10: Top Overlay "16" at 4440,4830 h50; Top Overlay "15" at 4385,4530 h50; Top Overlay "1" at 3720,4545 h50; Top Overlay "2" at 3715,4830 h50
P11: Top Overlay "16" at 3660,3940 h50 r180; Top Overlay "15" at 3660,4040 h50 r180; Top Overlay "1" at 4500,4005 h50; Top Overlay "2" at 4520,3940 h50 r180